# Altium PCB PCB2.PcbDoc (part 2 of 2)
Units mm, origin at the board's own origin, x right, y up, seen from the top; angles counter-clockwise.
Board outline 112.5 x 128.5 mm, 2 copper layers (Top Layer, Bottom Layer); 192 components, 158 nets, 643 pads, 146 vias.
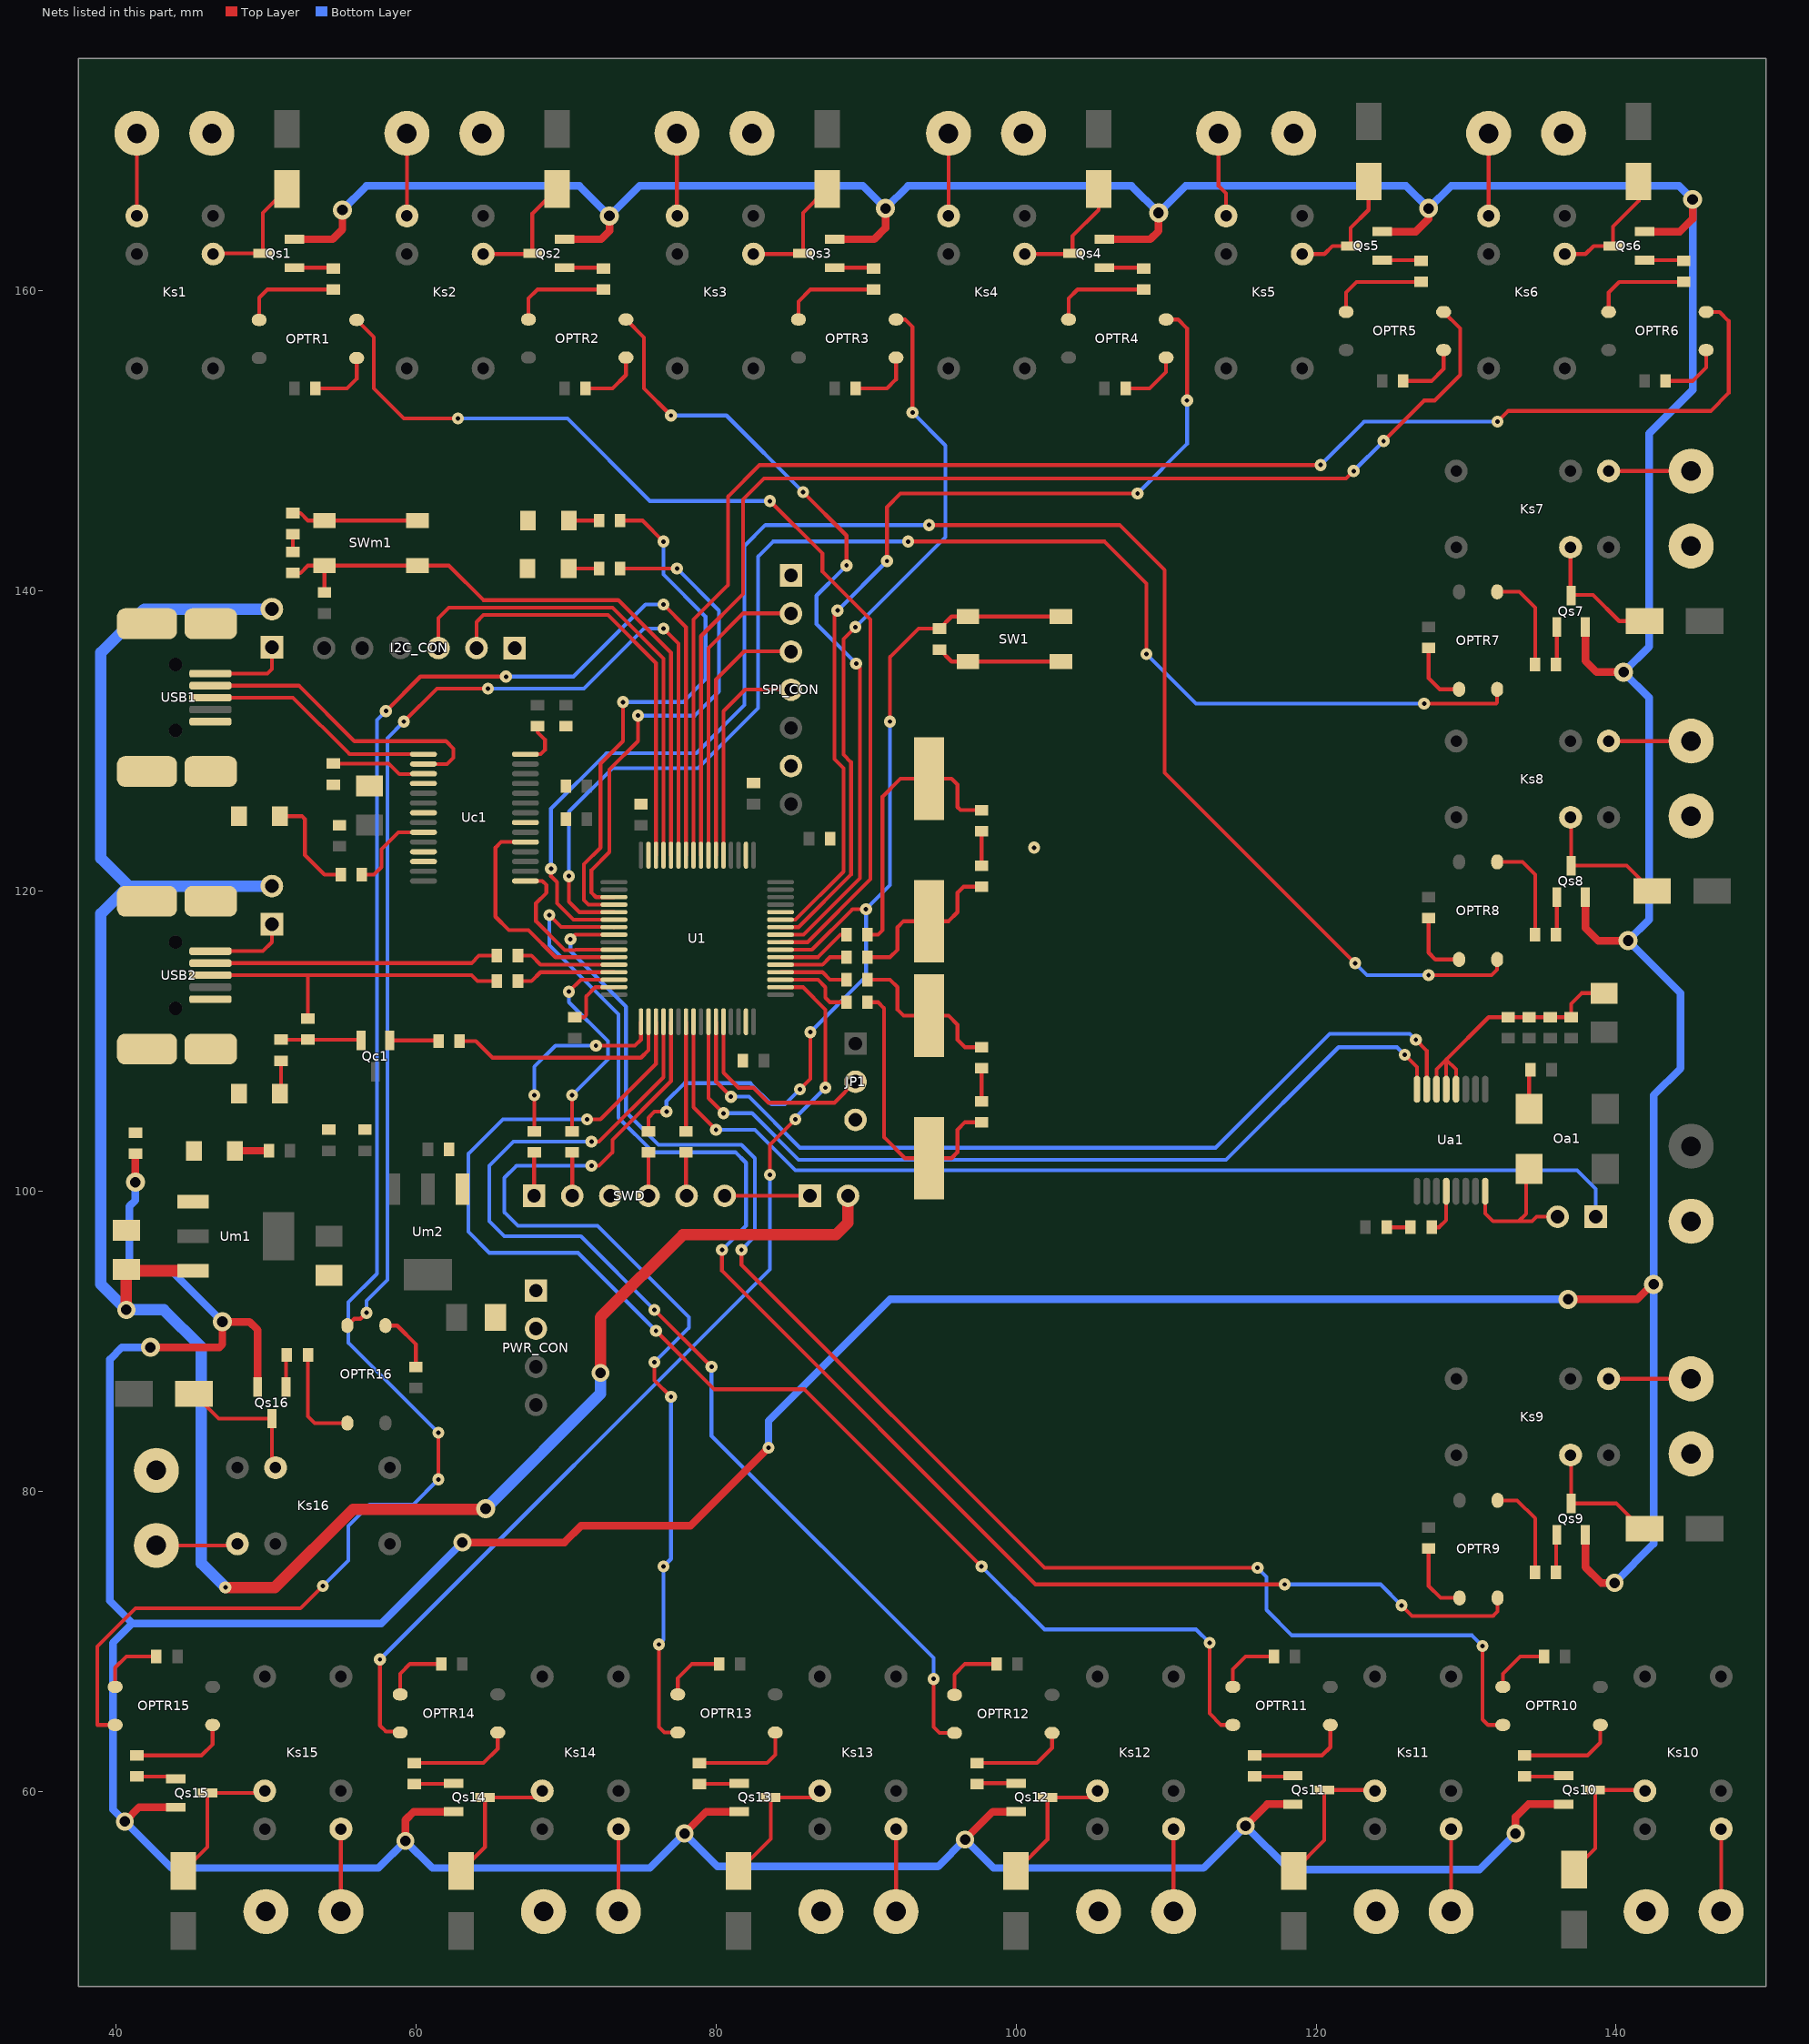
[diagram p2: the nets of this part, all layers, seen from the top]

## Via types
v1: diameter 0.8, hole 0.3, Top Layer to Bottom Layer, 118 vias
v2: diameter 1.27, hole 0.711, Top Layer to Bottom Layer, 16 vias
v3: diameter 1.2, hole 0.7, Top Layer to Bottom Layer, 12 vias

## Nets (pads, with @x,y where several pads share a name; then routed paths per layer and width w, separated by ;. In a path a pad name is that pad's centre, name@x,y a point inside that pad or via, vN(x,y) a via of type N, cw(c..) or ccw(c..) an arc to the next point about the centre after c; other vN are vias at no path point) (continued)
GND: C1.1 C2.1 C3.1 C4.1 C5.2 C7.1 C8.1 C9.1 C10.1 C12.1 Ca1.1 Ca2.1 Ca3.1 Ca4.1 Ca5.2 Ca6.1 Cc1.1 Cc2.1 Cc3.1 Cc4.1 Cc5.1 Cc6.2 Cm1.2 Cm2.2 Cm3.1 Cm4.1 Cm5.2 Cm6.1 CON2_a1.2 CONs1.2 CONs2.2 CONs3.2 CONs4.2 CONs5.2 CONs6.2 CONs7.2 CONs8.2 CONs9.2 CONs10.2 CONs11.2 CONs12.2 CONs13.2 CONs14.2 CONs15.2 CONs16.2 I2C_CON.1 JP1.3 LEDc2.2 LEDc3.2 LEDm1.2 LEDm2.2 LEDm3.2 Oa1.2 PWR_CON.1 PWR_CON.2 Rm5.1 Rs33.2 SPI_CON.1 SPI_CON.6 SW1.3 SW1.4 SWD.3 SWm1.3 SWm1.4 U1.12 U1.18 U1.31 U1.47 U1.63 Ua1.12 Ua1.13 Ua1.14 Uc1.7 Uc1.18 Uc1.21 Uc1.25 Uc1.26 Um1.1 Um2.1 USB1.5 USB1.6 USB1.7 USB1.8 USB1.9 USB2.5 USB2.6 USB2.7 USB2.8 USB2.9 | length 47.8
  Top Layer w0.254: USB1.8@46.325,127.975 USB1.8@46.5,127.8 ; Rm5.1@51.8,145.2 52.3,145.2 52.8,144.7 SWm1.4@53.9,144.7 SWm1.3@60.1,144.7 ; C7.1@70.6,111.6 71.2,111.6 71.346,111.746 71.346,112.988 71.958,113.6 U1.47@73.2,113.6 ; C5.2@94.9,136.1 95.7,135.3 SW1.3@96.8,135.3 SW1.4@103,135.3 ; C1.1@97.7,106 C2.1@97.7,108.2 ; C3.1@97.7,121.7 C4.1@97.7,124 ; Ua1.14@128.025,106.8 128.025,108.125 128.675,108.775 ; Ua1.13@128.675,106.8 128.675,108.775 ; Ua1.12@129.325,106.8 129.325,108.125 128.675,108.775 ; Oa1.2@134.2,105.5 134.2,108 Ca6.1@134.3,108.1 ; Ca5.2@139.2,113.2 137.7,113.2 137,112.5 Ca4.1@137,111.6 Ca3.1@135.6,111.6 Ca2.1@134.2,111.6 Ca1.1@132.8,111.6 131.5,111.6 128.675,108.775
  other v1: 101.2,122.9
MCLK: JPa1.1 U1.56 | length 70
  Top Layer w0.254: U1.56@78.5,111.3 78.5,105.6 v1(80,104.1)
  Bottom Layer w0.254: v1(80,104.1) 82.6,104.1 85.3,101.4 137.4,101.4 138.64,100.16 JPa1.1@138.64,98.3
MISO: SPI_CON.3 U1.22 | length 17.5
  Top Layer w0.254: U1.22@80,122.4 80,134.1 81.88,135.98 84.98,135.98 SPI_CON.3@85,135.96
MOSI: SPI_CON.2 U1.23 | length 20.3
  Top Layer w0.254: U1.23@79.5,122.4 79.5,136.2 81.82,138.52 84.98,138.52 SPI_CON.2@85,138.5
NetC1_2: C1.2 R1.1 X1.2 | length 18.8
  Top Layer w0.254: R1.1@90.1,112.6 90.8,112.6 91.2,112.2 91.2,103.6 92.6,102.2 X1.2@94.2,102.2 95.7,102.2 96.1,102.6 96.1,104.1 96.6,104.6 C1.2@97.7,104.6
NetC2_2: C2.2 R2.1 X1.1 | length 10.9
  Top Layer w0.254: R2.1@90.1,114.1 91.6,114.1 92.1,113.6 92.1,112.1 92.5,111.7 X1.1@94.2,111.7 95.5,111.7 96.1,111.1 96.1,110.1 96.6,109.6 C2.2@97.7,109.6
NetC3_2: C3.2 R3.1 X2.1 | length 11.2
  Top Layer w0.254: R3.1@90.1,115.6 91.6,115.6 92.1,116.1 92.1,117.6 92.5,118 X2.1@94.2,118 95.5,118 96.1,118.6 96.1,119.9 96.5,120.3 C3.2@97.7,120.3
NetC4_2: C4.2 R4.1 X2.2 | length 18.9
  Top Layer w0.254: R4.1@90.1,117.1 90.8,117.1 91.1,117.4 91.1,126.3 92.3,127.5 X2.2@94.2,127.5 95.7,127.5 96.1,127.1 96.1,125.6 96.3,125.4 C4.2@97.7,125.4
NetCc1_2: Cc1.2 Uc1.17 | length 6.3
  Top Layer w0.254: Cc1.2@54.5,128.5 58.2,128.5 58.9,127.8 60.475,127.8 Uc1.17@60.5,127.825
NetCm7_1: Cm7.1 Rm5.2 | length 1.2
  Top Layer w0.254: Cm7.1@51.8,142.6 Rm5.2@51.8,143.8
NetCONs1_1: CONs1.1 Ks1.3 | length 5.5
  Top Layer w0.254: Ks1.3@41.4,165 CONs1.1@41.4,170.5
NetCONs2_1: CONs2.1 Ks2.3 | length 5.5
  Top Layer w0.254: Ks2.3@59.4,165 CONs2.1@59.4,170.5
NetCONs3_1: CONs3.1 Ks3.3 | length 5.5
  Top Layer w0.254: CONs3.1@77.4,170.5 77.4,165.02 Ks3.3@77.42,165
NetCONs4_1: CONs4.1 Ks4.3 | length 5.5
  Top Layer w0.254: Ks4.3@95.5,165 CONs4.1@95.5,170.5 ; Ks4.3@95.6,164.66 Ks4.3@95.62,164.64
NetCONs5_1: CONs5.1 Ks5.3 | length 5.7
  Top Layer w0.254: CONs5.1@113.5,170.5 113.5,167 114,166.5 Ks5.3@114,165
NetCONs6_1: CONs6.1 Ks6.3 | length 5.5
  Top Layer w0.254: Ks6.3@131.5,165 CONs6.1@131.5,170.5
NetCONs7_1: CONs7.1 Ks7.3 | length 5.5
  Top Layer w0.254: Ks7.3@139.5,148 CONs7.1@145,148
NetCONs8_1: CONs8.1 Ks8.3 | length 5.5
  Top Layer w0.254: Ks8.3@139.5,130 CONs8.1@145,130
NetCONs9_1: CONs9.1 Ks9.3 | length 5.5
  Top Layer w0.254: Ks9.3@139.5,87.5 CONs9.1@145,87.5
NetCONs10_1: CONs10.1 Ks10.3 | length 5.5
  Top Layer w0.254: CONs10.1@147,52 Ks10.3@147,57.5
NetCONs11_1: CONs11.1 Ks11.3 | length 5.5
  Top Layer w0.254: CONs11.1@129,52 Ks11.3@129,57.5
NetCONs12_1: CONs12.1 Ks12.3 | length 5.5
  Top Layer w0.254: CONs12.1@110.5,52 Ks12.3@110.5,57.5
NetCONs13_1: CONs13.1 Ks13.3 | length 5.5
  Top Layer w0.254: CONs13.1@92,52 Ks13.3@92,57.5
NetCONs14_1: CONs14.1 Ks14.3 | length 5.5
  Top Layer w0.254: CONs14.1@73.5,52 Ks14.3@73.5,57.5
NetCONs15_1: CONs15.1 Ks15.3 | length 5.5
  Top Layer w0.254: CONs15.1@55,52 Ks15.3@55,57.5
NetCONs16_1: CONs16.1 Ks16.3 | length 5.4
  Top Layer w0.254: CONs16.1@42.7,76.4 48,76.4 Ks16.3@48.1,76.5
NetDs1_1: Ds1.1 Ks1.5 Qs1.3 | length 8.3
  Top Layer w0.254: Ks1.5@46.48,162.46 46.52,162.5 Qs1.3@49.8,162.5 49.8,165.2 Ds1.1@51.4,166.8
NetDs2_1: Ds2.1 Ks2.5 Qs2.3 | length 8.3
  Top Layer w0.254: Ks2.5@64.48,162.46 67.76,162.46 67.76,165.16 Ds2.1@69.4,166.8
NetDs3_1: Ds3.1 Ks3.5 Qs3.3 | length 8.3
  Top Layer w0.254: Ks3.5@82.5,162.46 85.76,162.46 Qs3.3@85.8,162.5 85.8,165.2 Ds3.1@87.4,166.8
NetDs4_1: Ds4.1 Ks4.5 Qs4.3 | length 8.2
  Top Layer w0.254: Ks4.5@100.58,162.46 103.76,162.46 103.76,163.66 105.5,165.4 Ds4.1@105.5,166.8
NetDs5_1: Ds5.1 Ks5.5 Qs5.3 | length 8.2
  Top Layer w0.254: Ks5.5@119.08,162.46 120.56,162.46 121.1,163 Qs5.3@122.3,163 122.3,164.2 123.5,165.4 Ds5.1@123.5,167.3
NetDs6_1: Ds6.1 Ks6.5 Qs6.3 | length 8.4
  Top Layer w0.254: Ks6.5@136.58,162.46 137.96,162.46 138.5,163 Qs6.3@139.8,163 139.8,164.3 141.5,166 Ds6.1@141.5,167.3
NetDs7_1: Ds7.1 Ks7.5 Qs7.3 | length 8.8
  Top Layer w0.254: Ks7.5@136.96,142.92 136.96,139.74 138.46,139.74 140.2,138 Ds7.1@141.9,138
NetDs8_1: Ds8.1 Ks8.5 Qs8.3 | length 9.3
  Top Layer w0.254: Ks8.5@136.96,124.92 137,124.88 Qs8.3@137,121.7 140.7,121.7 Ds8.1@142.4,120
NetDs9_1: Ds9.1 Ks9.5 Qs9.3 | length 8.8
  Top Layer w0.254: Ks9.5@136.96,82.42 137,82.38 Qs9.3@137,79.2 140,79.2 141.7,77.5 Ds9.1@141.9,77.5
NetDs10_1: Ds10.1 Ks10.5 Qs10.3 | length 9.2
  Top Layer w0.254: Ds10.1@137.2,54.8 138.6,56.2 Qs10.3@138.6,60.1 141.86,60.1 Ks10.5@141.92,60.04
NetDs11_1: Ds11.1 Ks11.5 Qs11.3 | length 9.6
  Top Layer w0.254: Ds11.1@118.5,54.7 120.55,56.75 Qs11.3@120.55,60.1 123.86,60.1 Ks11.5@123.92,60.04
NetDs12_1: Ds12.1 Ks12.5 Qs12.3 | length 9.3
  Top Layer w0.254: Ds12.1@100,54.7 102.1,56.8 Qs12.3@102.1,59.6 104.98,59.6 Ks12.5@105.42,60.04
NetDs13_1: Ds13.1 Ks13.5 Qs13.3 | length 9.2
  Top Layer w0.254: Ds13.1@81.5,54.7 83.65,56.85 Qs13.3@83.65,59.6 86.48,59.6 Ks13.5@86.92,60.04
NetDs14_1: Ds14.1 Ks14.5 Qs14.3 | length 9.6
  Top Layer w0.254: Ds14.1@63,54.7 64.6,56.3 Qs14.3@64.6,59.6 67.98,59.6 Ks14.5@68.42,60.04
NetDs15_1: Ds15.1 Ks15.5 Qs15.3 | length 9.7
  Top Layer w0.254: Ds15.1@44.5,54.7 46.1,56.3 Qs15.3@46.1,59.9 49.78,59.9 Ks15.5@49.92,60.04
NetDs16_1: Ds16.1 Ks16.5 Qs16.3 | length 9.3
  Top Layer w0.254: Ds16.1@45.2,86.5 46.85,84.85 Qs16.3@50.4,84.85 50.4,81.82 Ks16.5@50.64,81.58
NetJP1_2: JP1.2 U1.60 | length 13.6
  Top Layer w0.254: U1.60@80.5,111.3 80.5,107.9 81.5,106.9 82.5,106.9 83.5,105.9 87.9,105.9 JP1.2@89.3,107.3
NetJPa1_2: JPa1.2 Oa1.3 Ua1.8 | length 10.4
  Top Layer w0.254: Ua1.8@131.275,100 131.275,98.525 131.8,98 133.5,98 ; Oa1.3@134.2,101.5 134,101.3 134,98.5 133.5,98 ; JPa1.2@136.1,98.3 134.7,98.3 134.4,98 133.5,98
NetJPc1_1: JPc1.1 USB1.1 | length 5.7
  Top Layer w0.254: USB1.1@46.3,134.5 49.5,134.5 ; 49.5,134.5 50.1,134.5 50.4,134.8 JPc1.1@50.4,136.26
NetJPc2_1: JPc2.1 SWD.6 | length 5.7
  Top Layer w0.254: SWD.6@80.58,99.7 JPc2.1@86.26,99.7
NetJPc3_1: JPc3.1 USB2.1 | length 5.5
  Top Layer w0.254: USB2.1@46.3,116 49.8,116 50.4,116.6 JPc3.1@50.4,117.8
NetLEDc2_1: LEDc2.1 Rc10.1 | length 7.2
  Top Layer w0.254: LEDc2.1@50.931,125 52.4,125 52.6,124.8 52.6,122.4 53.9,121.1 Rc10.1@55.1,121.1
NetLEDc3_1: LEDc3.1 Rc11.1 | length 2.2
  Top Layer w0.254: LEDc3.1@50.931,106.5 51,106.569 Rc11.1@51,108.7
NetLEDm1_1: LEDm1.1 Rm1.1 | length 2.3
  Top Layer w0.508: LEDm1.1@47.931,102.7 Rm1.1@50.2,102.7
NetLEDm2_1: LEDm2.1 Rm2.1 | length 2
  Top Layer w0.254: LEDm2.1@70.173,141.5 Rm2.1@72.2,141.5
NetLEDm3_1: LEDm3.1 Rm3.1 | length 2
  Top Layer w0.254: LEDm3.1@70.2,144.7 Rm3.1@72.2,144.7
NetOPTR1_1: OPTR1.1 Rs1.1 | length 4.4
  Top Layer w0.254: Rs1.1@53.3,153.5 55.4,153.5 56.05,154.15 OPTR1.1@56.05,155.53
NetOPTR1_3: OPTR1.3 Rs2.1 | length 6.7
  Top Layer w0.254: OPTR1.3@49.55,158.07 49.55,159.55 50.1,160.1 Rs2.1@54.5,160.1
NetOPTR2_1: OPTR2.1 Rs3.1 | length 4.2
  Top Layer w0.254: Rs3.1@71.3,153.5 73.1,153.5 74,154.4 OPTR2.1@74,155.56
NetOPTR2_3: OPTR2.3 Rs4.1 | length 6.6
  Top Layer w0.254: OPTR2.3@67.5,158.1 67.5,159.5 68.1,160.1 Rs4.1@72.5,160.1
NetOPTR3_1: OPTR3.1 Rs5.1 | length 4.4
  Top Layer w0.254: Rs5.1@89.3,153.5 91.4,153.5 92,154.1 OPTR3.1@92,155.56
NetOPTR3_3: OPTR3.3 Rs6.1 | length 6.5
  Top Layer w0.254: OPTR3.3@85.5,158.1 85.5,159.3 86.3,160.1 Rs6.1@90.5,160.1
NetOPTR4_1: OPTR4.1 Rs7.1 | length 4.1
  Top Layer w0.254: Rs7.1@107.3,153.5 108.9,153.5 110,154.6 OPTR4.1@110,155.56
NetOPTR4_3: OPTR4.3 Rs8.1 | length 6.6
  Top Layer w0.254: OPTR4.3@103.5,158.1 103.5,159.5 104.1,160.1 Rs8.1@108.5,160.1
NetOPTR5_1: OPTR5.1 Rs9.1 | length 4.3
  Top Layer w0.254: Rs9.1@125.8,154 127.7,154 128.5,154.8 OPTR5.1@128.5,156.06
NetOPTR5_3: OPTR5.3 Rs10.1 | length 6.6
  Top Layer w0.254: OPTR5.3@122,158.6 122,159.9 122.7,160.6 Rs10.1@127,160.6
NetOPTR6_1: OPTR6.1 Rs11.1 | length 4.2
  Top Layer w0.254: Rs11.1@143.3,154 145.1,154 146,154.9 OPTR6.1@146,156.06
NetOPTR6_3: OPTR6.3 Rs12.1 | length 6.6
  Top Layer w0.254: OPTR6.3@139.5,158.6 139.5,159.9 140.2,160.6 Rs12.1@144.5,160.6
NetOPTR7_1: OPTR7.1 Rs13.1 | length 4.3
  Top Layer w0.254: Rs13.1@127.5,136.2 127.5,134.2 128.25,133.45 OPTR7.1@129.53,133.45
NetOPTR7_3: OPTR7.3 Rs14.1 | length 6.8
  Top Layer w0.254: OPTR7.3@132.07,139.95 133.55,139.95 134.6,138.9 Rs14.1@134.6,135.1
NetOPTR8_1: OPTR8.1 Rs15.1 | length 4.5
  Top Layer w0.254: Rs15.1@127.5,118.2 127.5,115.9 127.95,115.45 OPTR8.1@129.53,115.45
NetOPTR8_3: OPTR8.3 Rs16.1 | length 6.9
  Top Layer w0.254: OPTR8.3@132.07,121.95 133.75,121.95 134.6,121.1 Rs16.1@134.6,117.1
NetOPTR9_1: OPTR9.1 Rs17.1 | length 4.9
  Top Layer w0.254: Rs17.1@127.5,76.2 127.5,73.7 128.3,72.9 OPTR9.1@129.56,72.9
NetOPTR9_3: OPTR9.3 Rs18.1 | length 6.6
  Top Layer w0.254: OPTR9.3@132.1,79.4 133.4,79.4 134.6,78.2 Rs18.1@134.6,74.6
NetOPTR10_1: OPTR10.1 Rs19.1 | length 4.1
  Top Layer w0.254: OPTR10.1@132.45,66.97 132.45,67.85 133.6,69 Rs19.1@135.2,69
NetOPTR10_3: OPTR10.3 Rs20.1 | length 6.6
  Top Layer w0.254: Rs20.1@133.9,62.4 138.1,62.4 138.95,63.25 OPTR10.3@138.95,64.43
NetOPTR11_1: OPTR11.1 Rs21.1 | length 4.3
  Top Layer w0.254: OPTR11.1@114.45,66.97 114.45,68.15 115.3,69 Rs21.1@117.2,69
NetOPTR11_3: OPTR11.3 Rs22.1 | length 6.8
  Top Layer w0.254: Rs22.1@115.9,62.4 120.4,62.4 120.95,62.95 OPTR11.3@120.95,64.43
NetOPTR12_1: OPTR12.1 Rs23.1 | length 4.4
  Top Layer w0.254: OPTR12.1@95.9,66.44 95.9,67.8 96.6,68.5 Rs23.1@98.7,68.5
NetOPTR12_3: OPTR12.3 Rs24.1 | length 6.4
  Top Layer w0.254: Rs24.1@97.4,61.9 101.4,61.9 102.4,62.9 OPTR12.3@102.4,63.9
NetOPTR13_1: OPTR13.1 Rs25.1 | length 4.2
  Top Layer w0.254: OPTR13.1@77.45,66.47 77.45,67.55 78.4,68.5 Rs25.1@80.2,68.5
NetOPTR13_3: OPTR13.3 Rs26.1 | length 6.8
  Top Layer w0.254: Rs26.1@78.9,61.9 83.4,61.9 83.95,62.45 OPTR13.3@83.95,63.93
NetOPTR14_1: OPTR14.1 Rs27.1 | length 4.4
  Top Layer w0.254: OPTR14.1@58.95,66.47 58.95,67.85 59.6,68.5 Rs27.1@61.7,68.5
NetOPTR14_3: OPTR14.3 Rs28.1 | length 7
  Top Layer w0.254: Rs28.1@59.9,61.9 64.5,61.9 65.45,62.85 OPTR14.3@65.45,63.93
NetOPTR15_1: OPTR15.1 Rs29.1 | length 4.3
  Top Layer w0.254: OPTR15.1@39.95,66.97 39.95,68.25 40.7,69 Rs29.1@42.7,69
NetOPTR15_3: OPTR15.3 Rs30.1 | length 6.6
  Top Layer w0.254: Rs30.1@41.4,62.4 45.7,62.4 46.45,63.15 OPTR15.3@46.45,64.43
NetOPTR16_1: OPTR16.1 Rs31.1 | length 4
  Top Layer w0.254: OPTR16.1@57.97,91.05 58.75,91.05 60,89.8 Rs31.1@60,88.3
NetOPTR16_3: OPTR16.3 Rs32.1 | length 6.9
  Top Layer w0.254: Rs32.1@52.8,89.1 52.8,85 53.25,84.55 OPTR16.3@55.43,84.55
NetQc1_1: Qc1.1 Rc5.2 | length 3.3
  Top Layer w0.254: Qc1.1@58.25,110.05 61.45,110.05 Rc5.2@61.5,110
NetQc1_2: Qc1.2 Rc8.2 Rc11.2 | length 5.4
  Top Layer w0.254: Rc11.2@51,110.1 Rc8.2@52.8,110.1 56.3,110.1 Qc1.2@56.35,110.05
NetQs1_1: Qs1.1 Rs2.2 | length 2.6
  Top Layer w0.254: Qs1.1@51.9,161.55 54.45,161.55 Rs2.2@54.5,161.5
NetQs2_1: Qs2.1 Rs4.2 | length 2.6
  Top Layer w0.254: Qs2.1@69.9,161.55 72.45,161.55 Rs4.2@72.5,161.5
NetQs3_1: Qs3.1 Rs6.2 | length 2.6
  Top Layer w0.254: Qs3.1@87.9,161.55 90.45,161.55 Rs6.2@90.5,161.5
NetQs4_1: Qs4.1 Rs8.2 | length 2.6
  Top Layer w0.254: Qs4.1@105.9,161.55 108.45,161.55 Rs8.2@108.5,161.5
NetQs5_1: Qs5.1 Rs10.2 | length 2.6
  Top Layer w0.254: Qs5.1@124.4,162.05 126.95,162.05 Rs10.2@127,162
NetQs6_1: Qs6.1 Rs12.2 | length 2.6
  Top Layer w0.254: Qs6.1@141.9,162.05 144.45,162.05 Rs12.2@144.5,162
NetQs7_1: Qs7.1 Rs14.2 | length 2.5
  Top Layer w0.254: Rs14.2@136,135.1 136.05,135.15 Qs7.1@136.05,137.6
NetQs8_1: Qs8.1 Rs16.2 | length 2.5
  Top Layer w0.254: Rs16.2@136,117.1 136.05,117.15 Qs8.1@136.05,119.6
NetQs9_1: Qs9.1 Rs18.2 | length 2.5
  Top Layer w0.254: Rs18.2@136,74.6 136,77.05 Qs9.1@136.05,77.1
NetQs10_1: Qs10.1 Rs20.2 | length 2.6
  Top Layer w0.254: Rs20.2@133.9,61 136.45,61 Qs10.1@136.5,61.05
NetQs11_1: Qs11.1 Rs22.2 | length 2.6
  Top Layer w0.254: Rs22.2@115.9,61 118.4,61 Qs11.1@118.45,61.05
NetQs12_1: Qs12.1 Rs24.2 | length 2.6
  Top Layer w0.254: Rs24.2@97.4,60.5 97.45,60.55 Qs12.1@100,60.55
NetQs13_1: Qs13.1 Rs26.2 | length 2.7
  Top Layer w0.254: Rs26.2@78.9,60.5 81.5,60.5 Qs13.1@81.55,60.55
NetQs14_1: Qs14.1 Rs28.2 | length 2.6
  Top Layer w0.254: Rs28.2@59.9,60.5 62.45,60.5 Qs14.1@62.5,60.55
NetQs15_1: Qs15.1 Rs30.2 | length 2.7
  Top Layer w0.254: Rs30.2@41.4,61 43.85,61 Qs15.1@44,60.85
NetQs16_1: Qs16.1 Rs32.2 | length 2.2
  Top Layer w0.254: Qs16.1@51.35,86.95 51.35,89.05 Rs32.2@51.4,89.1
NetR1_2: R1.2 U1.3 | length 5.4
  Top Layer w0.254: U1.3@84.3,114.1 86.8,114.1 ; 86.8,114.092 86.808,114.092 87.3,113.6 87.3,112.9 87.6,112.6 R1.2@88.7,112.6
NetR2_2: R2.2 U1.4 | length 4.6
  Top Layer w0.254: U1.4@84.3,114.6 87.1,114.6 87.6,114.1 R2.2@88.7,114.1
NetR3_2: R3.2 U1.5 | length 4.6
  Top Layer w0.254: U1.5@84.3,115.1 87.1,115.1 87.6,115.6 R3.2@88.7,115.6
NetR4_2: R4.2 U1.6 | length 5
  Top Layer w0.254: U1.6@84.3,115.6 86.8,115.6 ; 86.8,115.608 86.808,115.608 88.3,117.1 R4.2@88.7,117.1
NetRa1_2: Ra1.2 Ra2.1 | length 1.6
  Top Layer w0.254: Ra1.2@124.7,97.6 Ra2.1@126.3,97.6
NetRa2_2: Ra2.2 Ua1.4 | length 3.1
  Top Layer w0.254: Ra2.2@127.7,97.6 128.2,97.6 128.675,98.075 Ua1.4@128.675,100
NetRc1_1: Rc1.1 SWD.5 | length 2.9
  Top Layer w0.254: Rc1.1@78,102.6 78,99.74 SWD.5@78.04,99.7
NetRc2_1: Rc2.1 SWD.4 | length 2.9
  Top Layer w0.254: SWD.4@75.5,99.7 Rc2.1@75.5,102.6
NetRc3_1: Rc3.1 SWD.2 | length 2.9
  Top Layer w0.254: Rc3.1@70.4,102.6 70.42,102.58 SWD.2@70.42,99.7
NetRc4_1: Rc4.1 SWD.1 | length 2.9
  Top Layer w0.254: SWD.1@67.88,99.7 67.88,102.58 Rc4.1@67.9,102.6
NetRc6_1: Rc6.1 USB2.2 | length 19.3
  Top Layer w0.254: USB2.2@46.3,115.2 63.7,115.2 64.2,115.7 Rc6.1@65.4,115.7
NetRc7_1: Rc7.1 Rc8.1 USB2.3 | length 22.2
  Top Layer w0.254: USB2.3@46.3,114.4 52.8,114.4 ; Rc8.1@52.8,111.5 52.8,114.4 ; Rc7.1@65.4,114 64.1,114 63.7,114.4 52.8,114.4
NetRc9_2: Rc9.2 Uc1.14 | length 3.2
  Top Layer w0.254: Uc1.14@67.3,129.125 68.325,129.125 68.6,129.4 68.6,130.1 68.1,130.6 Rc9.2@68.1,131
NetRc10_2: Rc10.2 Uc1.23 | length 6
  Top Layer w0.254: Rc10.2@56.4,121.1 57.2,121.1 57.7,121.6 57.7,122.8 58.825,123.925 Uc1.23@60.5,123.925
NetUc1_15: Uc1.15 USB1.3 | length 15.8
  Top Layer w0.254: USB1.3@46.3,132.9 51.8,132.9 55.575,129.125 Uc1.15@60.5,129.125
NetUc1_16: Uc1.16 USB1.2 | length 20.7
  Top Layer w0.254: USB1.2@46.3,133.7 52.2,133.7 55.9,130 62,130 62.5,129.5 62.5,128.9 62.075,128.475 Uc1.16@60.5,128.475
NRST: C5.1 Rc2.2 SW1.1 SW1.2 U1.7 | length 64
  Top Layer w0.254: Rc2.2@75.5,104 75.5,104.9 75.9,105.3 v1(76.7,105.3) ; U1.7@84.3,116.1 86.4,116.1 89.1,118.8 v1(90,118.8) ; v1(85.6,106.8) 86.3,107.5 v1(86.3,110.6) ; v1(91.6,131.3) 91.6,135.6 93.5,137.5 C5.1@94.9,137.5 95.7,138.3 SW1.1@96.8,138.3 SW1.2@103,138.3
  Bottom Layer w0.254: v1(76.7,105.3) 76.7,106 77.9,107.2 82.3,107.2 83.7,105.8 84.6,105.8 v1(85.6,106.8) ; v1(86.3,110.6) 90,114.3 v1(90,118.8) 91.6,120.4 v1(91.6,131.3)
PB0: OPTR15.2 U1.26 | length 128.6
  Top Layer w0.254: OPTR15.2@39.95,64.43 38.77,64.43 38.77,69.67 41.3,72.2 52.3,72.2 v1(53.8,73.7) ; v1(58,132) 60.3,134.3 v1(66,134.3) ; v1(61.5,80.8) v1(61.5,83.9) ; v1(76.5,139.1) 78,137.6 U1.26@78,122.4
  Bottom Layer w0.254: v1(53.8,73.7) 55.5,75.4 55.5,77.7 56.9,79.1 59.8,79.1 v1(61.5,80.8) ; v1(58,132) 57.4,131.4 57.4,94.5 55.5,92.6 55.5,89.9 v1(61.5,83.9) ; v1(66,134.3) 70.5,134.3 75.3,139.1 v1(76.5,139.1)
PB1: OPTR16.2 U1.27 | length 77.4
  Top Layer w0.254: OPTR16.2@55.43,91.05 55.88,91.5 56.3,91.5 v1(56.7,91.9) ; v1(59.2,131.3) 61.4,133.5 v1(64.8,133.5) ; v1(76.5,137.5) 77.5,136.5 U1.27@77.5,122.4
  Bottom Layer w0.254: v1(56.7,91.9) 56.7,92.7 58.1,94.1 58.1,130.2 v1(59.2,131.3) ; v1(64.8,133.5) 71.2,133.5 75.2,137.5 v1(76.5,137.5)
PB2: Cm7.2 Rm4.1 SWm1.1 SWm1.2 U1.28 | length 43.1
  Top Layer w0.254: Cm7.2@51.8,141.2 52.3,141.2 52.8,141.7 SWm1.2@53.9,141.7 ; Rm4.1@53.9,139.9 SWm1.2@53.9,141.7 ; U1.28@77,122.4 77,135.884 73.484,139.4 64.5,139.4 62.2,141.7 SWm1.1@60.1,141.7 SWm1.2@53.9,141.7
PB14: Rm2.2 U1.35 | length 33.9
  Top Layer w0.254: U1.35@73.2,119.6 72,119.6 71.7,119.9 71.7,121.4 72.9,122.6 72.9,128.1 74.8,130 v1(74.8,131.7) ; Rm2.2@73.6,141.5 v1(77.4,141.5)
  Bottom Layer w0.254: v1(74.8,131.7) 78.6,131.7 80.2,133.3 80.2,138.7 v1(77.4,141.5)
PB15: Rm3.2 U1.36 | length 36.4
  Top Layer w0.254: U1.36@73.2,119.1 71.5,119.1 71.2,119.4 71.2,121.8 72.3,122.9 72.3,128.5 73.8,130 v1(73.8,132.6) ; Rm3.2@73.6,144.7 75.1,144.7 v1(76.5,143.3)
  Bottom Layer w0.254: v1(73.8,132.6) 77.8,132.6 79.3,134.1 79.3,138.3 76.5,141.1 v1(76.5,143.3)
PC0: OPTR1.2 U1.8 | length 70.3
  Top Layer w0.254: OPTR1.2@56.05,158.07 57.2,156.92 57.2,153.5 59.2,151.5 v1(62.8,151.5) ; v1(83.6,146) 87.1,142.5 87.1,141.3 90.3,138.1 90.3,120.8 86.1,116.6 U1.8@84.3,116.6
  Bottom Layer w0.254: v1(62.8,151.5) 70.1,151.5 75.6,146 v1(83.6,146)
PC1: OPTR2.2 U1.9 | length 54.4
  Top Layer w0.254: OPTR2.2@74,158.1 75.2,156.9 75.2,153.5 v1(77,151.7) ; U1.9@84.3,117.1 85.842,117.1 89.6,120.858 89.6,134.9 v1(89.342,135.158) ; v1(85.8,146.6) 88.7,143.7 v1(88.7,141.7)
  Bottom Layer w0.254: v1(77,151.7) 80.7,151.7 v1(85.8,146.6) ; v1(88.7,141.7) 88.35,141.35 86.7,139.7 86.7,137.8 v1(89.342,135.158)
PC2: OPTR3.2 U1.10 | length 47.9
  Top Layer w0.254: U1.10@84.3,117.6 85.5,117.6 89,121.1 89,128.6 88.5,129.1 88.5,136.8 v1(89.3,137.6) ; OPTR3.2@92,158.1 92.6,158.1 93.1,157.6 v1(93.1,151.9)
  Bottom Layer w0.254: v1(89.3,137.6) 95.3,143.6 95.3,149.7 v1(93.1,151.9)
PC3: OPTR4.2 U1.11 | length 62.6
  Top Layer w0.254: U1.11@84.3,118.1 85.3,118.1 88.5,121.3 88.5,128.2 87.9,128.8 87.9,138.5 v1(88.1,138.7) ; v1(91.4,142) 91.4,145.6 92.3,146.5 v1(108.1,146.5) ; OPTR4.2@110,158.1 110.8,158.1 111.4,157.5 v1(111.4,152.7)
  Bottom Layer w0.254: v1(88.1,138.7) v1(91.4,142) ; v1(108.1,146.5) 111.4,149.8 v1(111.4,152.7)
PC4: OPTR5.2 U1.24 | length 80.8
  Top Layer w0.254: U1.24@79,122.4 79,137 81.8,139.8 81.8,146.1 83.2,147.5 122,147.5 v1(122.5,148) ; v1(124.5,150) 127.2,152.7 127.9,152.7 129.6,154.4 129.6,157.5 OPTR5.2@128.5,158.6
  Bottom Layer w0.254: v1(122.5,148) v1(124.5,150)
PC5: OPTR6.2 U1.25 | length 101
  Top Layer w0.254: U1.25@78.5,122.4 78.5,138.1 80.8,140.4 80.8,146.3 82.9,148.4 v1(120.3,148.4) ; v1(132.1,151.3) 132.8,152 146.3,152 147.5,153.2 147.5,158 146.9,158.6 OPTR6.2@146,158.6
  Bottom Layer w0.254: v1(120.3,148.4) 123.2,151.3 v1(132.1,151.3)
PC6: OPTR7.2 U1.37 | length 92.7
  Top Layer w0.254: v1(70.2,121) 70.2,119.3 70.9,118.6 U1.37@73.2,118.6 ; v1(92.8,143.3) 105.9,143.3 108.7,140.5 v1(108.7,135.8) ; v1(127.2,132.5) 132,132.5 132.07,132.57 OPTR7.2@132.07,133.45
  Bottom Layer w0.254: v1(70.2,121) 70.2,125.3 73.1,128.2 78.8,128.2 82.8,132.2 82.8,142.3 83.8,143.3 v1(92.8,143.3) ; v1(108.7,135.8) 112,132.5 v1(127.2,132.5)
PC7: OPTR8.2 U1.38 | length 109
  Top Layer w0.254: v1(69,121.5) 69,121 69.4,120.6 69.4,119.2 70.5,118.1 U1.38@73.2,118.1 ; v1(94.2,144.4) 106.9,144.4 109.9,141.4 109.9,127.9 v1(122.6,115.2) ; v1(127.5,114.4) 131.7,114.4 132.07,114.77 OPTR8.2@132.07,115.45
  Bottom Layer w0.254: v1(69,121.5) 69,125.5 72.7,129.2 78.7,129.2 81.9,132.4 81.9,143 83.3,144.4 v1(94.2,144.4) ; v1(122.6,115.2) 123.4,114.4 v1(127.5,114.4)
PC8: OPTR9.2 U1.39 | length 99.9
  Top Layer w0.254: v1(68.9,118.4) 69.68,117.62 73.18,117.62 U1.39@73.2,117.6 ; v1(80.4,96.1) 80.4,94.7 101.3,73.8 v1(117.9,73.8) ; v1(125.7,72.4) 126.4,71.7 131.8,71.7 132.1,72 OPTR9.2@132.1,72.9
  Bottom Layer w0.254: v1(68.9,118.4) 68.9,116.4 73.5,111.8 73.5,104.9 75.8,102.6 81.3,102.6 82,101.9 82,97.7 v1(80.4,96.1) ; v1(117.9,73.8) 124.3,73.8 v1(125.7,72.4)
PC9: OPTR10.2 U1.40 | length 101
  Top Layer w0.254: v1(70.3,116.8) 70.6,117.1 U1.40@73.2,117.1 ; v1(81.7,96.1) 81.7,95.1 101.9,74.9 v1(116.1,74.9) ; v1(131.1,69.7) 131.1,64.8 131.47,64.43 OPTR10.2@132.45,64.43
  Bottom Layer w0.254: v1(70.3,116.8) 70.3,116 74,112.3 74,105.267 76.167,103.1 81.7,103.1 82.6,102.2 82.6,97 v1(81.7,96.1) ; v1(116.1,74.9) 116.7,74.3 116.7,72.1 118.4,70.4 130.4,70.4 v1(131.1,69.7)
PC10: OPTR11.2 U1.51 | length 90.3
  Top Layer w0.254: v1(71.4,104.8) 72.3,104.8 76,108.5 U1.51@76,111.3 ; v1(76,90.7) 79.9,86.8 85.9,86.8 v1(97.7,75) ; v1(112.9,69.9) 112.9,65.2 113.67,64.43 OPTR11.2@114.45,64.43
  Bottom Layer w0.254: v1(71.4,104.8) 65.8,104.8 63.5,102.5 63.5,97.3 64.9,95.9 70.8,95.9 v1(76,90.7) ; v1(97.7,75) 101.9,70.8 112,70.8 v1(112.9,69.9)
PC11: OPTR12.2 U1.52 | length 72
  Top Layer w0.254: v1(71.7,103.3) 72.2,103.3 76.5,107.6 U1.52@76.5,111.3 ; v1(75.9,92.1) v1(79.7,88.3) ; v1(94.5,67.5) 94.5,64.3 94.9,63.9 OPTR12.2@95.9,63.9
  Bottom Layer w0.254: v1(71.7,103.3) 66.5,103.3 64.9,101.7 64.9,98 65.9,97 71,97 v1(75.9,92.1) ; v1(79.7,88.3) 79.7,83.7 94.5,68.9 v1(94.5,67.5)
PC12: OPTR13.2 U1.53 | length 66.2
  Top Layer w0.254: v1(71.7,101.7) 72.2,101.7 73.1,102.6 73.1,103.433 77,107.333 U1.53@77,111.3 ; v1(75.9,88.6) 75.9,87.4 v1(77,86.3) ; v1(76.2,69.8) 76.2,64.3 76.57,63.93 OPTR13.2@77.45,63.93
  Bottom Layer w0.254: v1(71.7,101.7) 66.7,101.7 65.9,100.9 65.9,98.6 66.8,97.7 72.1,97.7 78.2,91.6 78.2,90.9 v1(75.9,88.6) ; v1(76.2,69.8) 76.5,70.1 v1(76.5,75) 77,75.5 v1(77,86.3)
PC13: OPTR14.2 U1.2 | length 65.2
  Top Layer w0.254: v1(57.6,68.8) 57.6,64.4 58,64 58.88,64 OPTR14.2@58.95,63.93 ; v1(83.6,101.1) 83.6,103.1 v1(85.3,104.8) ; U1.2@84.3,113.6 85.8,113.6 87.3,112.1 v1(87.3,106.9)
  Bottom Layer w0.254: v1(57.6,68.8) 83.6,94.8 v1(83.6,101.1) ; v1(85.3,104.8) 85.3,104.9 v1(87.3,106.9)
SCK: SPI_CON.4 U1.21 | length 14.7
  Top Layer w0.254: U1.21@80.5,122.4 80.5,132 81.94,133.44 84.98,133.44 SPI_CON.4@85,133.42
SCL: U1.58 Ua1.16 | length 59.2
  Top Layer w0.254: U1.58@79.5,111.3 79.5,106.2 v1(80.5,105.2) ; v1(125.9,109.1) 126.725,108.275 Ua1.16@126.725,106.8
  Bottom Layer w0.254: v1(80.5,105.2) 82.4,105.2 85.5,102.1 114,102.1 121.5,109.6 125.4,109.6 v1(125.9,109.1)
SCL2: I2C_CON.3 U1.29 | length 31.8
  Top Layer w0.254: I2C_CON.3@61.5,136.2 61.5,138.2 62.2,138.9 73.1,138.9 76.5,135.5 U1.29@76.5,122.4
SDA: U1.59 Ua1.15 | length 59.4
  Top Layer w0.254: U1.59@80,111.3 80,107.3 v1(81,106.3) ; v1(126.65,110.1) 127.375,109.375 Ua1.15@127.375,106.8
  Bottom Layer w0.254: v1(81,106.3) 82.2,106.3 85.6,102.9 113.3,102.9 120.9,110.5 126.25,110.5 v1(126.65,110.1)
SDA2: I2C_CON.2 U1.30 | length 28
  Top Layer w0.254: I2C_CON.2@64.04,136.2 64.04,137.94 64.5,138.4 72.8,138.4 76,135.2 U1.30@76,122.4
SWO: Rc1.2 U1.55 | length 7.3
  Top Layer w0.254: Rc1.2@78,104 U1.55@78,111.3
TCK: Rc4.2 U1.49 | length 13.3
  Top Layer w0.254: Rc4.2@67.9,104 v1(67.9,106.4) ; v1(72,109.7) 74.6,109.7 75,110.1 U1.49@75,111.3
  Bottom Layer w0.254: v1(67.9,106.4) 67.9,108.3 69.3,109.7 v1(72,109.7)
TMS: Rc3.2 U1.46 | length 14.7
  Top Layer w0.254: v1(70.2,113.3) 71,114.1 U1.46@73.2,114.1 ; Rc3.2@70.4,104 v1(70.4,106.4)
  Bottom Layer w0.254: v1(70.2,113.3) 70.2,112.6 72.8,110 72.8,108.8 v1(70.4,106.4)
UART_RX: U1.43 Uc1.5 | length 15.8
  Top Layer w0.254: Uc1.5@67.3,123.275 65.675,123.275 65.3,122.9 65.3,118.3 66.2,117.4 67.5,117.4 69.3,115.6 U1.43@73.2,115.6
UART_TX: U1.42 Uc1.1 | length 10.2
  Top Layer w0.254: Uc1.1@67.3,120.675 68.425,120.675 68.7,120.4 68.7,119.9 68,119.2 68,118 69.93,116.07 70.602,116.07 70.633,116.1 U1.42@73.2,116.1
USB_DM: Rc6.2 U1.44 | length 6.7
  Top Layer w0.254: Rc6.2@66.7,115.7 Rc6.2@66.8,115.7 67.7,115.7 68.3,115.1 U1.44@73.2,115.1
USB_DP: Rc7.2 U1.45 | length 6.7
  Top Layer w0.254: Rc7.2@66.7,114 Rc7.2@66.8,114 67.7,114 68.3,114.6 U1.45@73.2,114.6
USB_EN: Rc5.1 U1.50 | length 15.2
  Top Layer w0.254: Rc5.1@62.9,110 64,110 65.1,108.9 75,108.9 75.5,109.4 U1.50@75.5,111.3
VGND: Qs1.2 Qs2.2 Qs3.2 Qs4.2 Qs5.2 Qs6.2 Qs7.2 Qs8.2 Qs9.2 Qs10.2 Qs11.2 Qs12.2 Qs13.2 Qs14.2 Qs15.2 Qs16.2 Rs33.1 | length 541.2
  Top Layer w0.508: v3(40.6,58) 41.55,58.95 Qs15.2@44,58.95 ; v2(41.3,100.6) Rs33.1@41.3,102.5 ; v2(42.3,89.6) 46.9,89.6 47.1,89.8 v2(47.1,91.3) 48.9,91.3 49.45,90.75 Qs16.2@49.45,86.95 ; Qs1.2@51.9,163.45 54.45,163.45 55.1,164.1 v2(55.1,165.4) ; v3(59.3,56.7) 59.3,58.1 59.85,58.65 Qs14.2@62.5,58.65 ; v3(63.1,76.6) 69.9,76.6 71,77.7 78.3,77.7 v1(83.5,82.9) ; Qs2.2@69.9,163.45 72.35,163.45 72.9,164 v2(72.9,165) ; v3(77.9,57.2) 79.35,58.65 Qs13.2@81.55,58.65 ; Qs3.2@87.9,163.45 90.55,163.45 91.3,164.2 v2(91.3,165.5) ; v3(96.6,56.8) 98.45,58.65 Qs12.2@100,58.65 ; Qs4.2@105.9,163.45 108.95,163.45 109.5,164 v2(109.5,165.2) ; v3(115.3,57.7) 116.75,59.15 Qs11.2@118.45,59.15 ; Qs5.2@124.4,163.95 126.65,163.95 127.5,164.8 v2(127.5,165.5) ; v3(133.3,57.2) 133.3,58.3 134.15,59.15 Qs10.2@136.5,59.15 ; v2(136.8,92.8) 141.4,92.8 142.4,93.8 v2(142.5,93.8) ; Qs9.2@137.95,77.1 137.95,74.95 139,73.9 v3(139.9,73.9) ; Qs8.2@137.95,119.6 137.95,117.55 138.8,116.7 v2(140.8,116.7) ; Qs7.2@137.95,137.6 137.95,135.35 138.7,134.6 v2(140.5,134.6) ; Qs6.2@141.9,163.95 144.25,163.95 145.1,164.8 v2(145.1,166.1)
  Bottom Layer w0.508: v2(41.3,100.6) 41.3,99.4 40.9,99 40.9,95.1 41.4,94.6 43.8,94.6 v2(47.1,91.3) ; v2(42.3,89.6) 40.4,89.6 39.6,88.8 39.6,72.7 41.1,71.2 ; v2(55.1,165.4) 56.7,167 70.9,167 v2(72.9,165) 74.9,167 89.8,167 v2(91.3,165.5) 92.8,167 107.7,167 v2(109.5,165.2) 111.3,167 126,167 v2(127.5,165.5) 129,167 144.2,167 v2(145.1,166.1) 145.1,153.4 142.2,150.5 142.2,136.3 v2(140.5,134.6) 142.2,132.9 142.2,118.1 v2(140.8,116.7) 144.3,113.2 144.3,108.2 142.5,106.4 v2(142.5,93.8) 142.5,76.5 v3(139.9,73.9) ; v3(63.1,76.6) 57.7,71.2 41.1,71.2 ; v1(83.5,82.9) 83.5,84.7 91.6,92.8 v2(136.8,92.8) ; v3(133.3,57.2) 130.9,54.8 118.2,54.8 v3(115.3,57.7) 112.5,54.9 98.5,54.9 v3(96.6,56.8) 94.8,55 80.1,55 v3(77.9,57.2) 75.6,54.9 61.1,54.9 v3(59.3,56.7) 57.5,54.9 43.7,54.9 v3(40.6,58) 39.8,58.8 39.8,69.9 41.1,71.2
Vin: Cm1.1 JPc1.2 JPc2.2 JPc3.2 Um1.3 | length 154.2
  Top Layer w0.254: Cm1.1@40.7,94.5 Cm1.1@40.9,94.7 ; v2@64.6,78.8 v2(64.65,78.85)
  Top Layer w0.762: v3(40.7,92.1) Cm1.1@40.7,94.5 ; Cm1.1@40.9,94.7 Um1.3@45.15,94.7 ; v1(47.3,73.6) 50.6,73.6 55.8,78.8 59.5,78.8 v2@64.6,78.8 ; v3(72.3,87.9) 72.3,91.6 77.8,97.1 88,97.1 88.8,97.9 JPc2.2@88.8,99.7
  Bottom Layer w0.254: 39,122.18 39,122.2
  Bottom Layer w0.762: 39,122.18 40.84,120.34 ; 39,122.2 39,135.9 41.9,138.8 JPc1.2@50.4,138.8 ; v1(47.3,73.6) 45.7,75.2 45.7,89.6 43.2,92.1 v3(40.7,92.1) 39,93.8 39,118.5 40.84,120.34 ; JPc3.2@50.4,120.34 40.84,120.34 ; v2(64.65,78.85) 72.3,86.5 v3(72.3,87.9)
pads on no net: I2C_CON.4 I2C_CON.5 Ks1.2 Ks2.2 Ks3.2 Ks4.2 Ks5.2 Ks6.2 Ks7.2 Ks8.2 Ks9.2 Ks10.2 Ks11.2 Ks12.2 Ks13.2 Ks14.2 Ks15.2 Ks16.2 Oa1.1 U1.14 U1.15 U1.16 U1.17 U1.33 U1.34 U1.41 U1.54 U1.57 U1.61 U1.62 Ua1.1 Ua1.2 Ua1.3 Ua1.7 Uc1.2 Uc1.3 Uc1.6 Uc1.8 Uc1.9 Uc1.10 Uc1.11 Uc1.12 Uc1.13 Uc1.19 Uc1.22 Uc1.24 Uc1.27 Uc1.28 USB1.4 USB1.X USB1.Y USB2.4 USB2.X USB2.Y
copper on no net:
  other v1: 59.7,51.3 96.2,51.3 133.1,52 73.6,80.7 94.2,87.8 146.6,92.4 74.9,96.7 87,104.1 42.7,105.3 43.6,106.3 42.1,106.4 100.6,107.1 83.9,107.2 132.5,108.8 129.9,112 137.2,114.9 60,117.8 43.7,124.2 87.4,126.4 74,127.2 69.9,129 82.3,129.2 99.7,132.3 146.4,134.6 69.6,136.7 65,143.2 52.6,147 54.5,170.7 90.9,170.8 126.8,171.2

## Polygon pours and split planes (outlines as drawn)
GND on Bottom Layer "Bottom Overlay-No Net" (solid, pour order 4): 150,47 37.5,47 37.5,175.5 150,175.5
GND on Top Layer "Top Overlay-No Net" (solid, pour order 6): 37.5,175.5 37.5,47 150,47 150,175.5